# EAGLE board wireless_potentiostat (EAGLE 8.7.0)
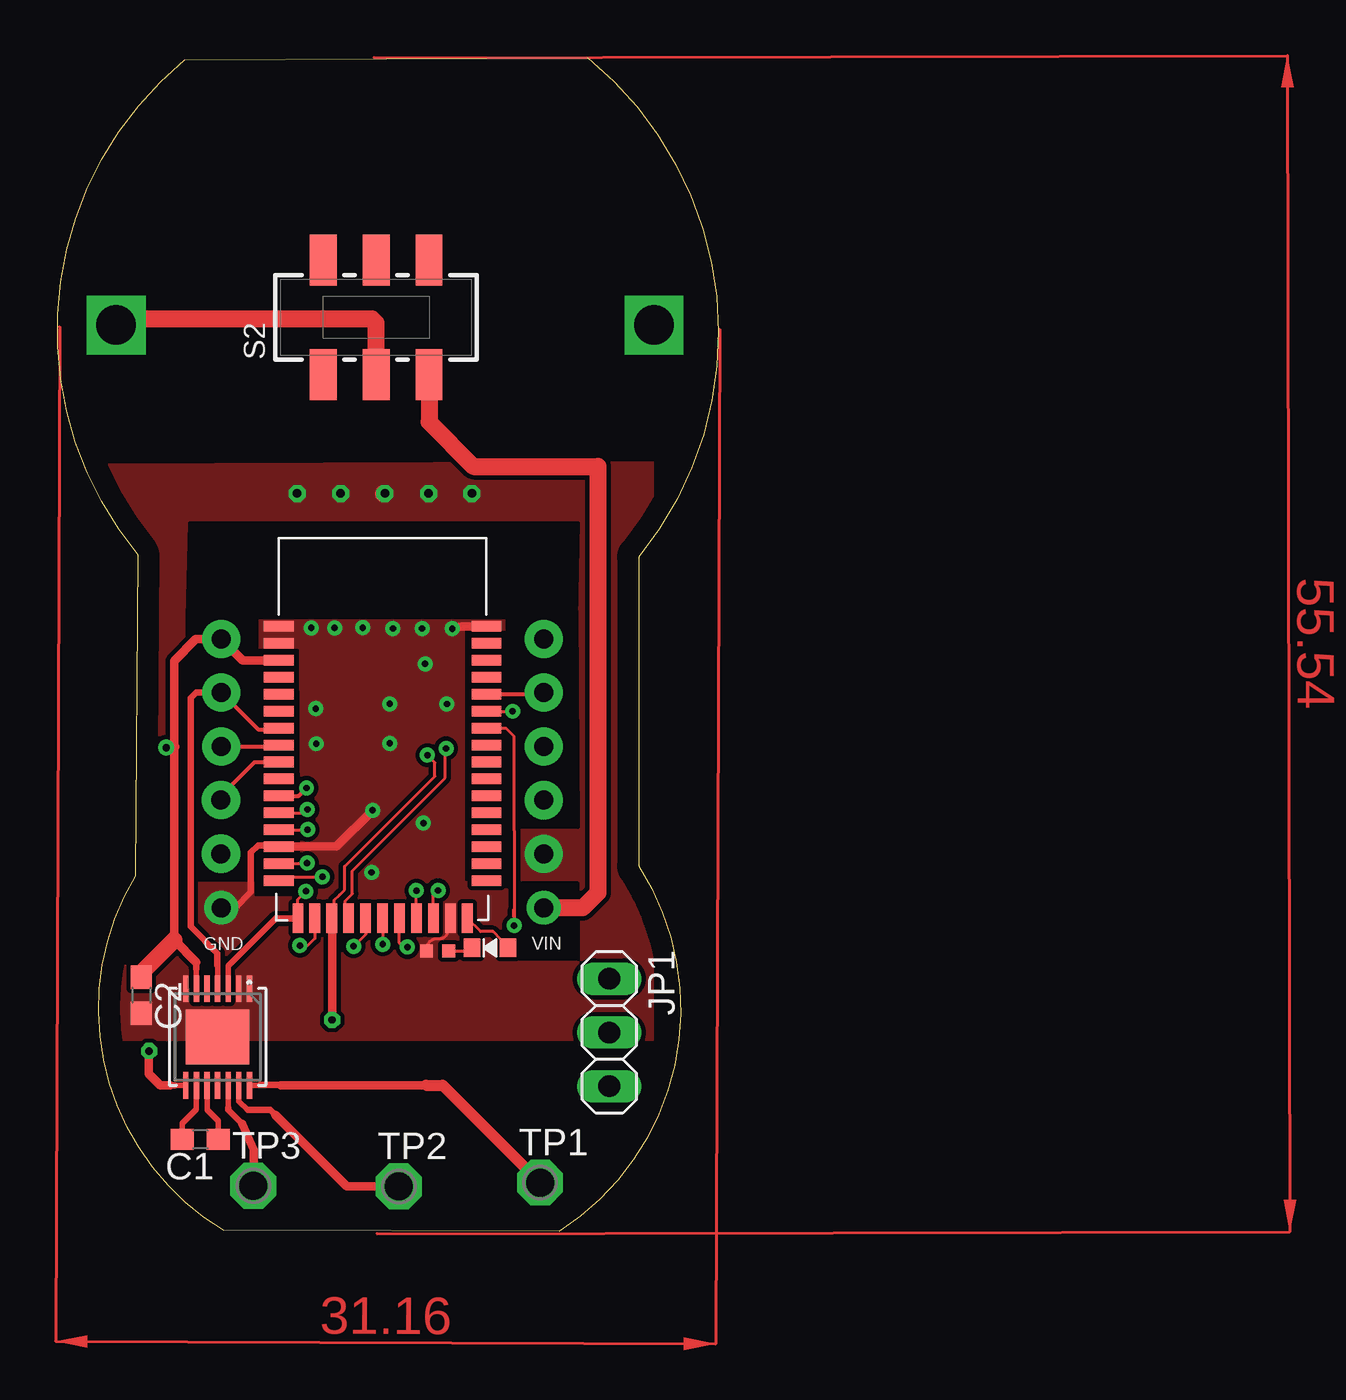
[diagram p0: board, top side]
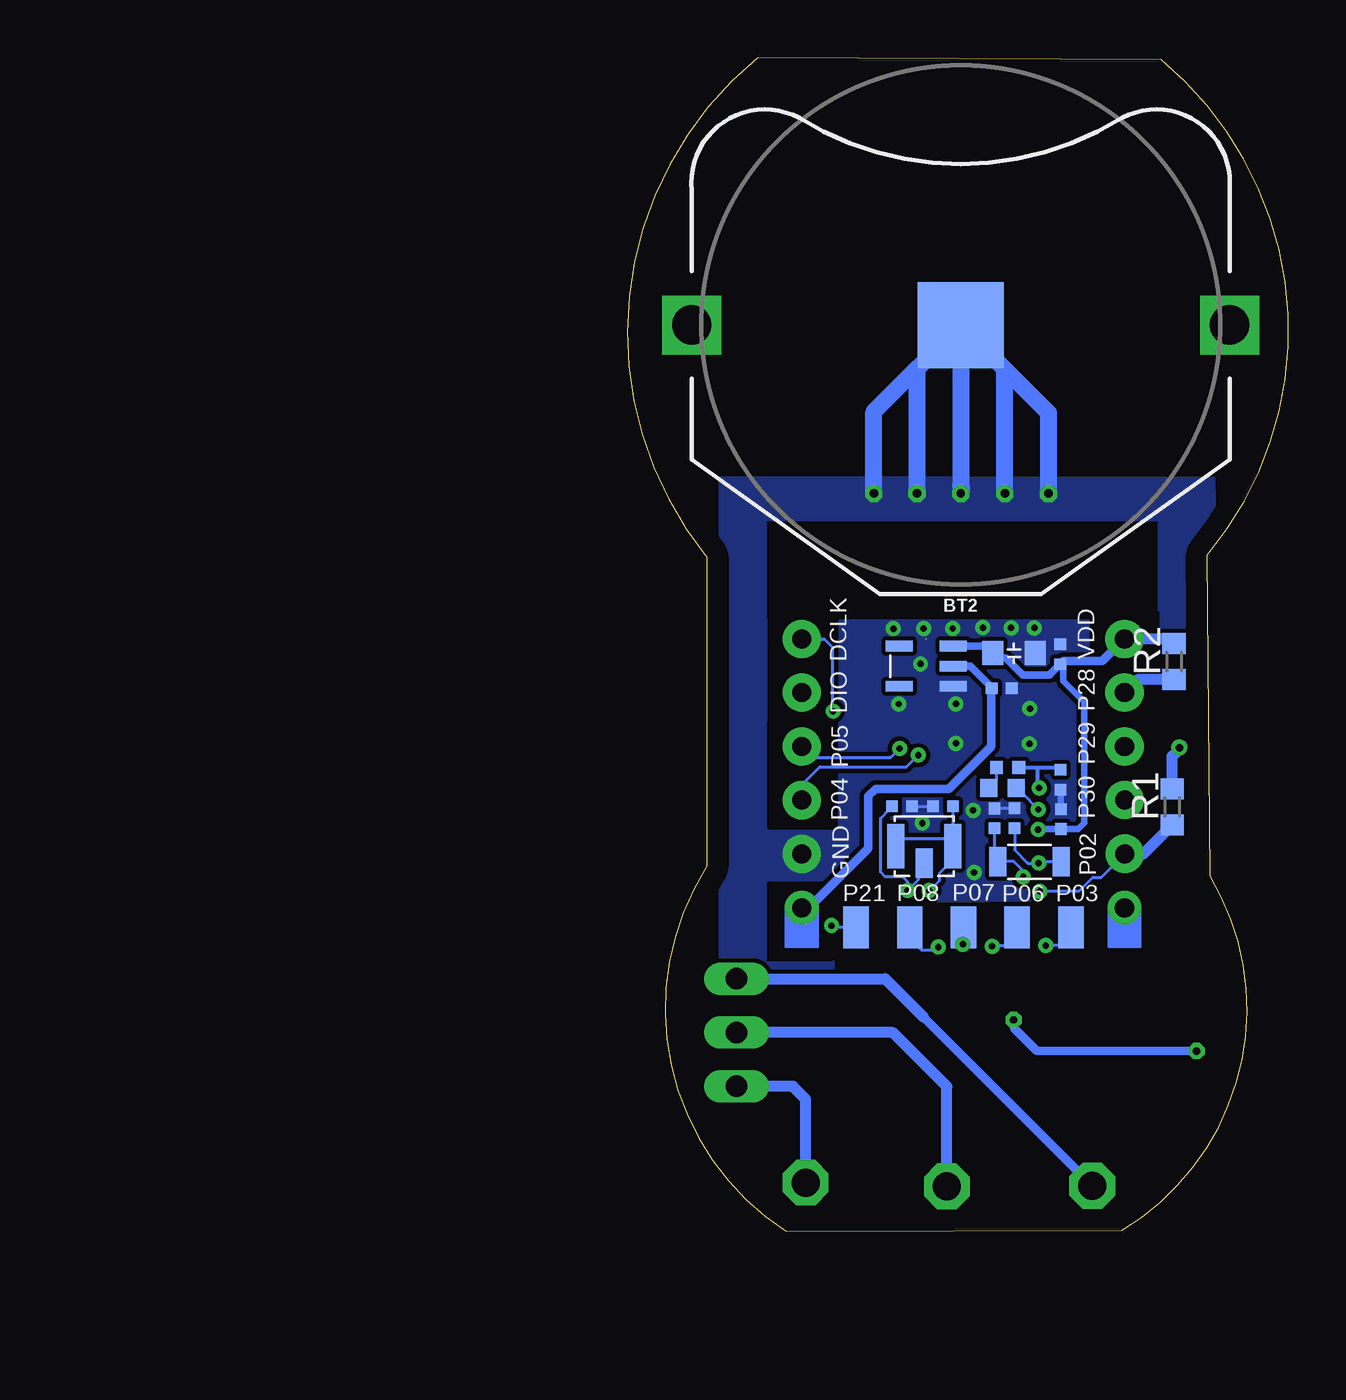
[diagram p1: board, bottom side, seen from below]

Size 31.2 x 55.44 mm. Coordinates in mm from the lower left corner, seen from the top.
Outline: 27.44,31.86 27.44,17.25 arc-90 23.69,0 7.84,0.05 arc-90 3.69,16.79 3.81,31.94 arc-90 6,55.34 25.04,55.44 arc-90 27.44,31.86
Copper layers (1*16): Top 0.035mm / dielectric 1.5mm / Bottom 0.035mm
Design rules "default *": minimum track width 10mil, minimum drill 10mil, track to track 8mil, track to pad 8mil, pad to pad 8mil, via to via 8mil, smd to smd 8mil, copper to edge 40mil, drill to drill 8mil, minimum pad ring 10mil, minimum via ring 8mil, stop-mask expansion 4mil, vias tented up to drill 0mil, thermal gap 10mil
Net classes: 0 default: clearance 0.205 mm; 2 Power: width 0.203 mm, drill 0.305 mm, clearance 0.152 mm to class 0, clearance 0.152 mm to class 1, clearance 0.152 mm

## Footprints (pad centres in the part's own frame; a part is rotated, then mirrored left to right if it is on the bottom)
DOT_1 = drill 0.9 pad 1.6: 1 0,0
BATTCON_24.5MM_PTH = drill 1.854 square: 1 -12.7,0; 3 12.7,0 | smd 4.064 x 4.064: 2 0,0
C0603 = smd 1.1 x 1: 1 -0.85,0; 2 0.85,0
C-0402 = smd 0.55 x 0.55: 1 -0.47,0; 2 0.47,0
C0805 = smd 1 x 1.146: 1 -1,0; 2 1,0
DOT_1.5 = drill 0.9 pad 1.8: 1 0,0
1X03 = drill 1.016 long: 1 -2.54,0; 2 0,0; 3 2.54,0
R0603 = smd 0.8 x 0.85: 1 -0.65,0; 2 0.65,0
R0402 = smd 0.6 x 0.6: 1 -0.525,0; 2 0.525,0
LED0603 = smd 0.762 x 0.889: 1 -0.85,0; 2 0.85,0
1P = smd 2 x 1.2: P$1 0,-0.01
TPEB = drill 0.9 pad 1.8: 1 0,0
R0603' = smd 1 x 1.1: 1 -0.85,0; 2 0.85,0
IPEX = smd 0.8 x 1.4: 1 0,-0.8 | smd 0.8 x 2.1: 2 1.35,0; 3 -1.35,0
JS202011SCQN = smd 1.27 x 2.4: 1 -2.5,-2.7; 2 0,-2.7; 3 2.5,-2.7; 4 -2.5,2.7; 5 0,2.7; 6 2.5,2.7
P1-13 = drill 1.321 pad 2.159 octagon: TP 0,0
SOT-23-5 = smd 1.27 x 0.508: 1 -1.27,0.953; 2 -1.27,0; 3 -1.27,-0.953; 4 1.27,-0.953; 5 1.27,0.953
SDA14B = smd 1.27 x 0.25: 1 -2.281,1.5; 2 -2.281,1; 3 -2.281,0.5; 4 -2.281,0; 5 -2.281,-0.5; 6 -2.281,-1; 7 -2.281,-1.5; 8 2.281,-1.5; 9 2.281,-1; 10 2.281,-0.5; 11 2.281,0; 12 2.281,0.5; 13 2.281,1; 14 2.281,1.5 | smd 2.6 x 3: 15 0,0
RBT07 = smd 1.4 x 0.5: 1 -0.649,13.085; 2 -0.649,12.285; 3 -0.649,11.485; 4 -0.649,10.685; 5 -0.649,9.885; 6 -0.649,9.085; 7 -0.649,8.285; 8 -0.649,7.485; 9 -0.649,6.685; 10 -0.649,5.885; 11 -0.649,5.085; 12 -0.649,4.285; 13 -0.649,3.485; 14 -0.649,2.685; 15 -0.649,1.885; 16 -0.649,1.085; 28 9.151,1.085; 29 9.151,1.885; 30 9.151,2.685; 31 9.151,3.485; 32 9.151,4.285; 33 9.151,5.085; 34 9.151,5.885; 35 9.151,6.685; 36 9.151,7.485; 37 9.151,8.285; 38 9.151,9.085; 39 9.151,9.885; 40 9.151,10.685; 41 9.151,11.485; 42 9.151,12.285; 43 9.151,13.085 | smd 0.5 x 1.4: 17 0.251,-0.7; 18 1.051,-0.7; 19 1.851,-0.7; 20 2.651,-0.7; 21 3.451,-0.7; 22 4.251,-0.7; 23 5.051,-0.7; 24 5.851,-0.7; 25 6.651,-0.7; 26 7.451,-0.7; 27 8.251,-0.7
CRY_3215 = smd 0.8 x 1.4: 1 -1.5,0; 2 1.5,0

## Placement (x,y rotation side)
1  TPDOT_1  [DOT_1]  7.72,15.29 90 top
BT2  [BATTCON_24.5MM_PTH]  15.46,42.81 0 bottom
C1  [C0603]  6.74,4.35 180 top
C2  [C0603]  3.95,11.16 270 top
CAP1  1UF  [C-0402]  10.75,21.34 90 bottom
CAP5  0.1UF  [C-0402]  10.72,19.48 90 bottom
CAP6  12PF  [C-0402]  12.91,19.52 270 bottom
CAP7  12PF  [C-0402]  13.86,19.51 90 bottom
CAP8  22uf  [C0805]  12.94,27.32 180 bottom
CAP9  0.1UF  [C-0402]  10.76,27.26 270 bottom
CAP10  0.1UF  [C-0402]  13.52,25.66 0 bottom
CAP24  NC  [C-0402]  18.23,20.08 0 bottom
CAP26  NC  [C-0402]  16.29,20.08 180 bottom
GND1  TPDOT_1.5  [DOT_1.5]  22.96,17.83 0 bottom
JP1  [1X03]  26.05,9.39 270 top
L3  10UH  [R0603]  13.49,20.95 0 bottom
L5  15NH  [R0402]  13.24,21.91 180 bottom
LED3  yellow  [LED0603]  20.42,13.4 180 top
P02  TPDOT_1.5  [DOT_1.5]  7.71,17.84 0 top
P03  1P  [1P]  10.25,14.36 90 bottom
P04  TPDOT_1.5  [DOT_1.5]  22.96,20.37 0 top
P05  TPDOT_1.5  [DOT_1.5]  22.96,22.91 0 top
P06  1P  [1P]  12.79,14.36 270 bottom
P07  1P  [1P]  15.33,14.36 90 bottom
P08  1P  [1P]  17.87,14.36 90 bottom
P28  TPTPEB  [TPEB]  7.72,25.45 0 top
P29  TPDOT_1.5  [DOT_1.5]  7.72,22.91 0 top
P30  TPDOT_1.5  [DOT_1.5]  7.71,20.38 0 top
R1  [R0603']  5.47,20.06 90 bottom
R2  [R0603']  5.38,26.91 90 bottom
R14  4.7K  [R0402]  17.94,13.25 0 top
RESET  1P  [1P]  20.41,14.36 90 bottom
RF-CON  NFC  [IPEX]  17.18,18.2 0 bottom
S2  JS202011SCQN  [JS202011SCQN]  15.04,43.17 0 top
SCLK  TPDOT_1.5  [DOT_1.5]  22.96,27.99 0 top
SDIO  TPDOT_1.5  [DOT_1.5]  22.96,25.45 0 top
TP1  TPPAD1-13  [P1-13]  22.78,2.31 0 top
TP2  TPPAD1-13  [P1-13]  16.11,2.13 0 top
TP3  TPPAD1-13  [P1-13]  9.24,2.15 0 top
U5  TLV70433TLV70433  [SOT-23-5]  17.08,26.7 180 bottom
U6  LMP91000_NHL_14  [SDA14B]  7.55,9.19 270 top
U$2  RBT07  [RBT07]  11.09,15.49 0 top
VDD  TPTPEB  [TPEB]  7.72,27.99 180 top
VIN  TPDOT_1  [DOT_1]  22.96,15.29 90 top
Y1  32.768KHZ  [CRY_3215]  12.21,17.46 0 bottom

## Library data of the parts
1 GND1 LED3 P02 P04 P05 P28-P30 RF-CON SCLK SDIO VDD VIN Y1 = RedBeard
BT2 = SparkFun-Batteries; SF_SKU: PRT-08863
C1 C2 = rcl; SPICEPREFIX: C
CAP1 CAP5-CAP9 CAP24 = NANO2
CAP10 CAP26 L3 L5 P03 P06-P08 R14 RESET U$2 = 1RedBeard
JP1 = pinhead
R1 R2 = rcl; SPICEPREFIX: R
S2 = switch-ck
TP1-TP3 = testpad
U5 = NANO2; U1: TLV70433DBVR
U6 = LMP91000; BASEPN: LMP91000; DATASHEETURL: httpwww.ti.comlitdssymlinklmp91000.pdf; MANUFACTURER: Texas Instruments; MANUFACTURER_PART_NUMBER: lmp91000_nhl_14; NSC_PACKAGEREFERENCE: SDA14B; VENDOR: Texas Instruments

## Nets
C1: C1.1 U6.10
C2: C1.2 U6.9
CE: JP1.3 TP1.TP U6.14
GND: 1.1 BT2.2 C2.2 CAP1.1 CAP5.2 CAP6.1 CAP7.2 CAP8.1 CAP9.1 CAP10.2 CAP24.2 CAP26.2 GND1.1 R14.1 U5.1 U6.1 U6.2 U6.7 U6.15 U$2.1 U$2.2 U$2.14 U$2.26 U$2.43
N$7: L3.1 L5.2
N$8: CAP1.2 L5.1 U$2.11
N$10: L3.2 U$2.12
N$11: SDIO.1 U$2.39
N$20: SCLK.1 U$2.38
N$21: RESET.P$1 U$2.37
N$28: CAP7.1 U$2.16 Y1.1
N$30: CAP6.2 U$2.15 Y1.2
N$31: P03.P$1 U$2.18
N$33: P05.1 U$2.20
N$34: P06.P$1 U$2.21
N$35: P29.1 U$2.8
N$37: P07.P$1 U$2.22
N$38: P08.P$1 U$2.23
N$39: LED3.2 R14.2
N$40: P30.1 U$2.9
P09: CAP26.1 RF-CON.2 RF-CON.3 U$2.24
P10: CAP24.1 RF-CON.1 U$2.25
P11: LED3.1 U$2.27
RE: JP1.2 TP2.TP U6.13
SCL: P02.1 R1.1 U6.3 U$2.17
SDA: P28.1 R2.1 U6.4 U$2.7
VBAT: BT2.3 S2.2
VCC: C2.1 CAP5.1 CAP8.2 CAP9.2 R1.2 R2.2 U5.3 U6.6 U$2.3 U$2.13 VDD.1
VIN: CAP10.1 S2.3 U5.2 VIN.1
VOUT: P04.1 U6.8 U$2.19
WE: JP1.1 TP3.TP U6.12

## Tracks (layer width: path | path; a pad name or v marks a point on that pad's centre or on a via)
C1
  Top 0.254: U6.10 7.05,5.75 7.59,5.22 C1.1
C2
  Top 0.254: U6.9 6.55,5.78 5.89,5.11 C1.2
CE
  Top 0.254: U6.14 9.56,6.91 9.57,6.92
  Top 0.305: 9.57,6.92 10.51,6.92 10.53,6.91
  Top 0.406: 10.53,6.91 17.39,6.91
  Top 0.508: 17.39,6.91 18.18,6.91 TP1.TP
  Bottom 0.508: JP1.3 23.38,6.85 22.78,6.25 TP1.TP
GND  (via drill 0.3 pad 0.55, 0.4)
  Top 0.13: U$2.26 18.51,14.76 18.41,14.19 arc-90 18.04,13.82 17.84,13.82 arc90 R14.1
  Top 0.15: 17.42,13.3 R14.1 17.5,13.37
  Top 0.305: 1.1 8.38,15.29 9.12,16.03 9.12,17.89 9.46,18.23 10.39,18.23 U$2.14
  Top 0.406: U$2.14 13.16,18.17 v14.87,19.89 | U$2.43 19.05,28.57 v18.63,28.47
  Top 0.813: v15.45,34.86 15.41,34.86 15.4,34.85
  Bottom 0.15: 17.65,19.91 17.48,20.08 CAP26.2 16.73,20.08 16.73,20.14 | CAP6.1 CAP7.2
  Bottom 0.2: CAP24.2 17.65,19.91
  Bottom 0.3: CAP1.1 10.72,20.84 CAP5.2 10.66,19.95
  Bottom 0.813: BT2.2 15.46,35.25 15.43,35.22 15.43,34.88 v15.45,34.86 | v13.37,34.86 13.37,40.72 BT2.2 | v11.31,34.86 11.31,38.66 BT2.2 | v17.52,34.86 17.52,40.76 BT2.2 | v19.56,34.86 19.56,38.71 BT2.2
  other vias: 15.68,24.92 12.19,24.7 11.98,28.51 17.36,26.81 15.69,23.05 17.27,19.29 12.21,23.04 18.38,24.91 14.82,16.96 13.08,28.51 15.83,28.48 17.21,28.47 14.41,28.51
  pour Bottom (no thermals): 3.48,35.57 26.83,35.6 26.83,10.96 3.45,10.96 3.45,34.55
  pour Top (no thermals): 28.08,36.34 28.08,9.04 2.25,9.04 2.25,36.22
N$7
  Bottom 0.15: L5.2 13.77,21.32 L3.1
N$8  (via drill 0.3 pad 0.55)
  Top 0.2: U$2.11 11.38,20.57 v11.75,20.95
  Bottom 0.2: L5.1 11.81,21.91 | 11.81,21.91 10.75,21.91 CAP1.2 | v11.75,20.95 11.81,20.95 11.81,21.91
N$10  (via drill 0.3 pad 0.55)
  Top 0.15: U$2.12 11.62,19.77 v11.79,19.93
  Bottom 0.15: L3.2 12.6,20.76 v11.79,19.93
N$11
  Top 0.2: U$2.39 22.89,25.37 SDIO.1
N$20  (via drill 0.3 pad 0.55)
  Top 0.15: U$2.38 v21.48,24.57
  Bottom 0.15: SCLK.1 21.9,27.99 21.51,27.6 21.51,24.6 v21.48,24.57
N$21  (via drill 0.3 pad 0.55)
  Top 0.15: U$2.37 21.17,23.77 21.54,23.4 v21.56,14.44 | 21.54,14.34 v21.56,14.44 | v21.56,14.44 21.54,15.21
  Bottom 0.13: RESET.P$1 21.47,14.36 arc90 v21.56,14.44
  Bottom 0.15: 21.51,14.36 v21.56,14.44
N$28  (via drill 0.3 pad 0.55)
  Top 0.15: 10.46,16.59 U$2.16 10.58,16.71 12.46,16.71 v12.5,16.75
  Bottom 0.15: CAP7.1 13.86,17.61 Y1.1 13.69,17.48 12.95,17.48 12.5,17.03 v12.5,16.75
N$30  (via drill 0.3 pad 0.55)
  Top 0.15: U$2.15 11.64,17.37 v11.78,17.4
  Bottom 0.15: Y1.2 11.62,17.46 v11.78,17.4 11.67,17.39 12.28,17.39 12.91,18.02 CAP6.2
N$31  (via drill 0.3 pad 0.55)
  Top 0.15: U$2.18 12.14,13.84 11.8,13.5 v11.44,13.5
  Bottom 0.15: P03.P$1 10.24,14.07 10.81,13.5 v11.44,13.5
N$33  (via drill 0.3 pad 0.55)
  Top 0.15: U$2.20 13.77,14.82 13.77,15.22 13.57,15.43 13.57,15.61 13.92,15.95 13.92,17.03 18.3,21.42 18.3,22.77 v18.34,22.81
  Bottom 0.15: 22.96,22.85 P05.1 22.44,22.39 18.76,22.39 v18.34,22.81
N$34  (via drill 0.3 pad 0.55)
  Top 0.15: U$2.21 14.54,14.04 v13.97,13.47
  Bottom 0.15: P06.P$1 13.08,14.36 13.08,13.57 13.17,13.48 v13.96,13.48 v13.97,13.47
N$35
  Top 0.2: P29.1 10.38,22.91 U$2.8
N$37  (via drill 0.3 pad 0.55)
  Top 0.15: U$2.22 v15.34,13.57 v15.35,13.57
  Bottom 0.15: P07.P$1 15.32,13.59 v15.35,13.57
N$38  (via drill 0.3 pad 0.55)
  Top 0.15: v16.51,13.43 16.14,13.63 U$2.23
  Bottom 0.15: 17.86,14.72 P08.P$1 17.86,13.85 17.32,13.3 16.52,13.3 v16.51,13.43
N$39
  Top 0.13: R14.2 19.48,13.25 LED3.2
  Top 0.15: 19.46,13.29 LED3.2
N$40
  Top 0.2: U$2.9 9.3,22.17 7.71,20.58 P30.1
N$42
  cutout Top: 19.28,28.33 21.25,28.34 21.29,16.22 19.3,16.58 19.3,28.5
N$43
  cutout Top: 9.33,27.48 11.34,27.48 11.41,15.88 9.35,15.88 9.35,27.3
N$44
  cutout Bottom: 6.18,33.49 24.57,33.49 24.57,28.97 6.2,28.97 6.2,33.46
N$45
  cutout Top: 6.23,33.48 24.59,33.48 24.49,28.98 6.13,28.98
N$46
  cutout Top: 21.29,29.31 24.51,29.31 24.57,19.07 21.29,19.07 21.23,29.28
N$47
  cutout Bottom: 21.28,29.26 24.52,29.26 24.54,19.06 21.3,19.06
N$48
  cutout Bottom: 21.52,16.47 24.54,16.47 24.55,12.84 21.53,12.84
  cutout Bottom: 6.22,16.47 9.24,16.47 9.25,12.84 6.23,12.84
  cutout Bottom: 9.36,12.52 9.36,15.54 21.34,15.43 21.34,12.41
N$50
  cutout Top: 21.53,16.48 24.55,16.48 24.57,12.84 21.55,12.83
N$51
  cutout Top: 6.12,29.23 9.4,29.23 9.4,16.58 6.12,16.58
N$52
  cutout Bottom: 6.12,29.22 9.32,29.22 9.32,16.58 6.12,16.58
P09  (via drill 0.3 pad 0.55)
  Top 0.15: U$2.24 v16.94,16.1
  Bottom 0.15: CAP26.1 15.83,19.9 RF-CON.2 | v16.94,16.1 16.92,16.1 16.46,16.56 16.46,16.91 16.08,17.29 16.08,17.58 15.83,17.83 RF-CON.2 | RF-CON.2 15.82,18.55 18.53,18.55 RF-CON.3
P10  (via drill 0.3 pad 0.55)
  Top 0.15: U$2.25 17.74,15.89 v17.96,16.11
  Bottom 0.15: CAP24.1 18.87,20.08 18.87,19.88 19.24,19.51 19.24,16.97 19.02,16.75 18.19,16.75 17.96,16.52 v17.96,16.11 17.46,16.61 17.46,16.78 17.18,17.06 RF-CON.1
P11
  Top 0.15: U$2.27 19.97,14.16 20.56,14.16 20.96,13.77 21,13.77 21,13.45 21.26,13.45 LED3.1
RE
  Top 0.254: U6.13 8.55,6.15 8.97,5.73
  Top 0.305: 8.97,5.73 10.05,5.73 10.27,5.52
  Top 0.406: TP2.TP 13.66,2.13 10.27,5.52
  Bottom 0.508: JP1.2 18.66,9.39 16.11,6.84 TP2.TP
SCL  (via drill 0.3 pad 0.55)
  Top 0.15: U$2.17 11.34,15.69 v11.72,16.07
  Top 0.254: U6.3 8.05,12.54 8.15,12.63
  Top 0.305: 8.15,12.63 10.31,14.79 U$2.17
  Bottom 0.15: v11.72,16.07 9.87,16.07 9.21,16.73 8.82,16.73 7.76,17.79 P02.1
  Bottom 0.508: R1.1 6.89,17.79 7.76,17.79
SDA
  Top 0.2: P28.1 9.46,23.71 10.38,23.71 U$2.7
  Top 0.254: U6.4 7.55,12.56 7.55,12.57
  Top 0.305: 7.55,12.57 7.55,13.14 6.29,14.4 6.29,25.19 6.55,25.45 P28.1
  Bottom 0.508: R2.1 7.11,26.06 P28.1
VBAT
  Top 0.813: S2.2 15.04,42.91 14.85,43.1 3.04,43.1 BT2.3
VCC  (via drill 0.3 pad 0.55, 0.35)
  Top 0.15: U$2.13 11.56,18.97 v11.8,18.98
  Top 0.254: U6.6 6.55,12.41
  Top 0.305: 6.55,12.41 6.55,12.71
  Top 0.406: U$2.3 8.74,26.97 VDD.1 6.53,27.99 5.5,26.95 5.5,22.89 5.5,13.77 6.55,12.71
  Top 0.508: v5.13,22.85 5.46,22.85 5.5,22.89
  Top 0.813: C2.1 3.95,12.22 5.5,13.77
  Bottom 0.3: CAP5.1 9.9,19.01 9.61,19.3 9.61,25 10.61,26 10.61,26.94 CAP9.2
  Bottom 0.305: CAP5.1 11.77,19.01 v11.8,18.98
  Bottom 0.35: U5.3 14.16,27.65 CAP8.2 13.61,27.09 13.34,27.09 12.53,26.29 11.25,26.29 11.25,26.3 CAP9.2
  Bottom 0.406: 10.61,26.94 8.77,26.94 VDD.1 | CAP9.2
  Bottom 0.508: R2.2 5.61,27.99 VDD.1 | R1.2 5.47,22.44 5.01,22.91 5.01,22.94 5.04,22.94 v5.13,22.85
VIN
  Top 0.813: S2.3 17.54,38.23 19.63,36.13 25.51,36.13 25.51,16 24.79,15.28 VIN.1
  Bottom 0.35: 14.01,25.73 14.04,25.73 15.01,26.7 U5.2
  Bottom 0.4: 14.01,22.9 16.01,20.9 19.47,20.9 19.81,20.56
  Bottom 0.406: 19.81,20.56 19.81,18.1 22.62,15.29 VIN.1 | 14.01,22.9 14.01,25.73 CAP10.1
VOUT  (via drill 0.3 pad 0.55, 0.35)
  Top 0.15: v17.46,22.5 17.81,22.15 17.81,21.5 13.55,17.24 13.55,16.14 13.32,15.9 13.31,15.9 13.06,15.65 13.06,14.91 U$2.19
  Top 0.254: U6.8 5.54,6.91 | 5.54,6.91
  Top 0.305: 5.54,6.91 5.32,6.91
  Top 0.406: 5.32,6.91 4.85,6.91 4.85,6.9 4.31,7.44 4.31,8.52 v4.32,8.52 | v12.96,9.99 12.96,14.77 U$2.19
  Bottom 0.15: P04.1 22.96,21.08 22.1,21.94 18.02,21.94 v17.46,22.5 17.48,22.5
  Bottom 0.406: v4.32,8.52 11.87,8.52 12.41,9.07 12.93,9.59 12.93,9.96 v12.96,9.99
WE
  Top 0.254: U6.12 8.05,5.84
  Top 0.305: 8.05,5.84 8.05,5.73 8.72,5.07
  Top 0.406: 8.72,5.07 9.26,3.86 9.26,2.17 TP3.TP
  Bottom 0.406: TP3.TP 17.2,10.11 17.2,10.18
  Bottom 0.508: JP1.1 19.02,11.93 17.2,10.11
(copper drawn outside any net)
  shapes: Top area x2

## Text on the board
tNames: GND | VIN
bNames: VDD | DCLK | P28 | DIO | P29 | P05 | P30 | P04 | P02 | GND | P03 | P06 | P07 | P08 | P21